# EAGLE board RCB-Board_SelfmadeLightv4 (EAGLE 5.11)
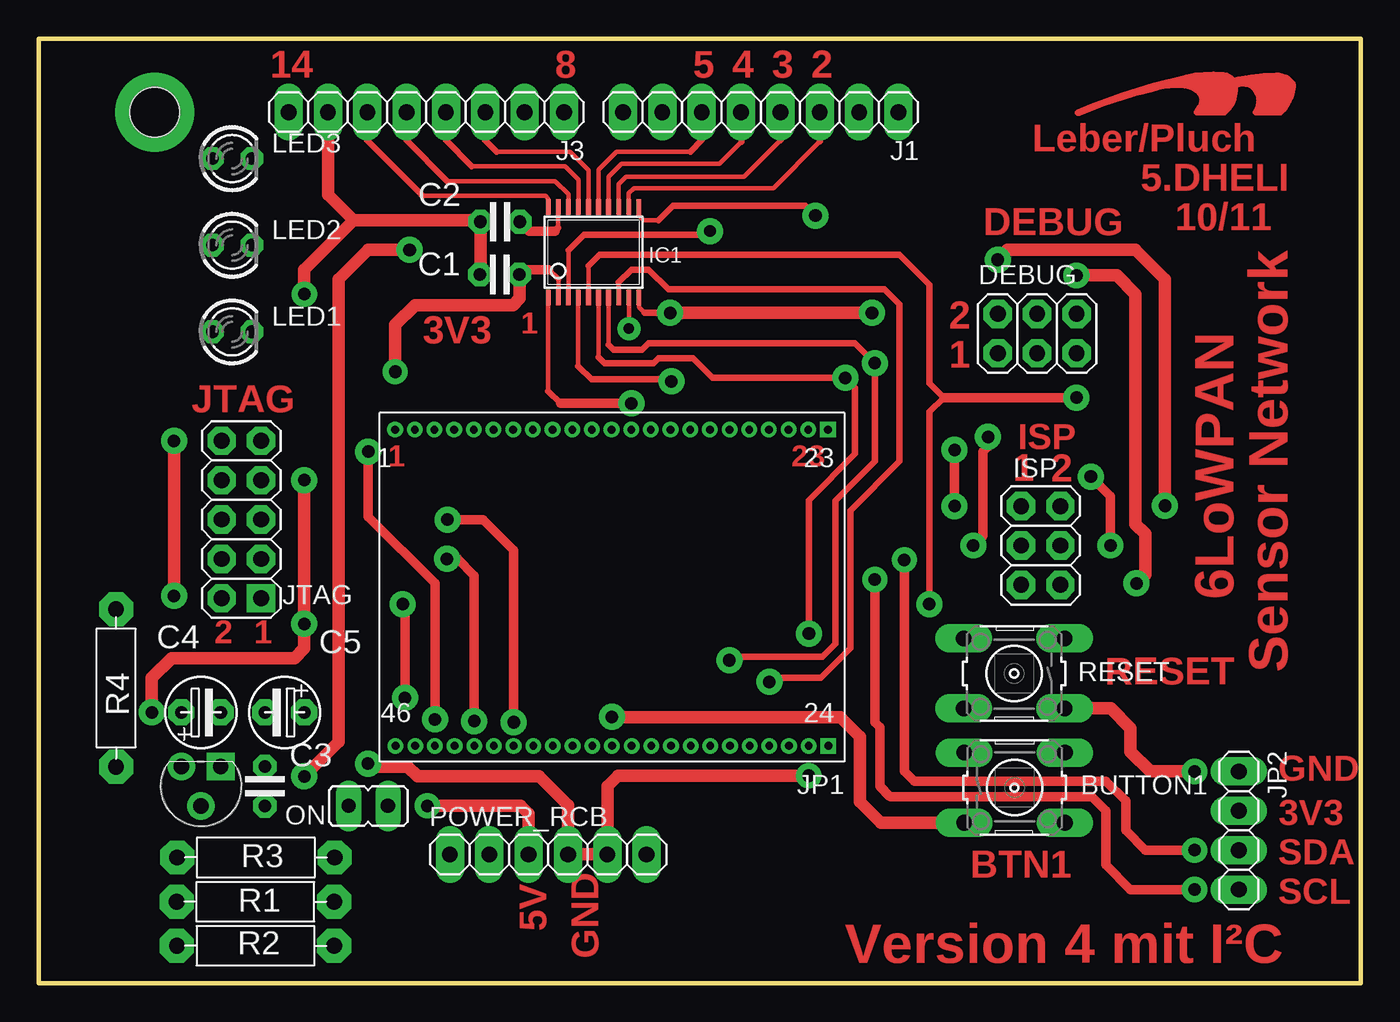
[diagram p0: board, top side]
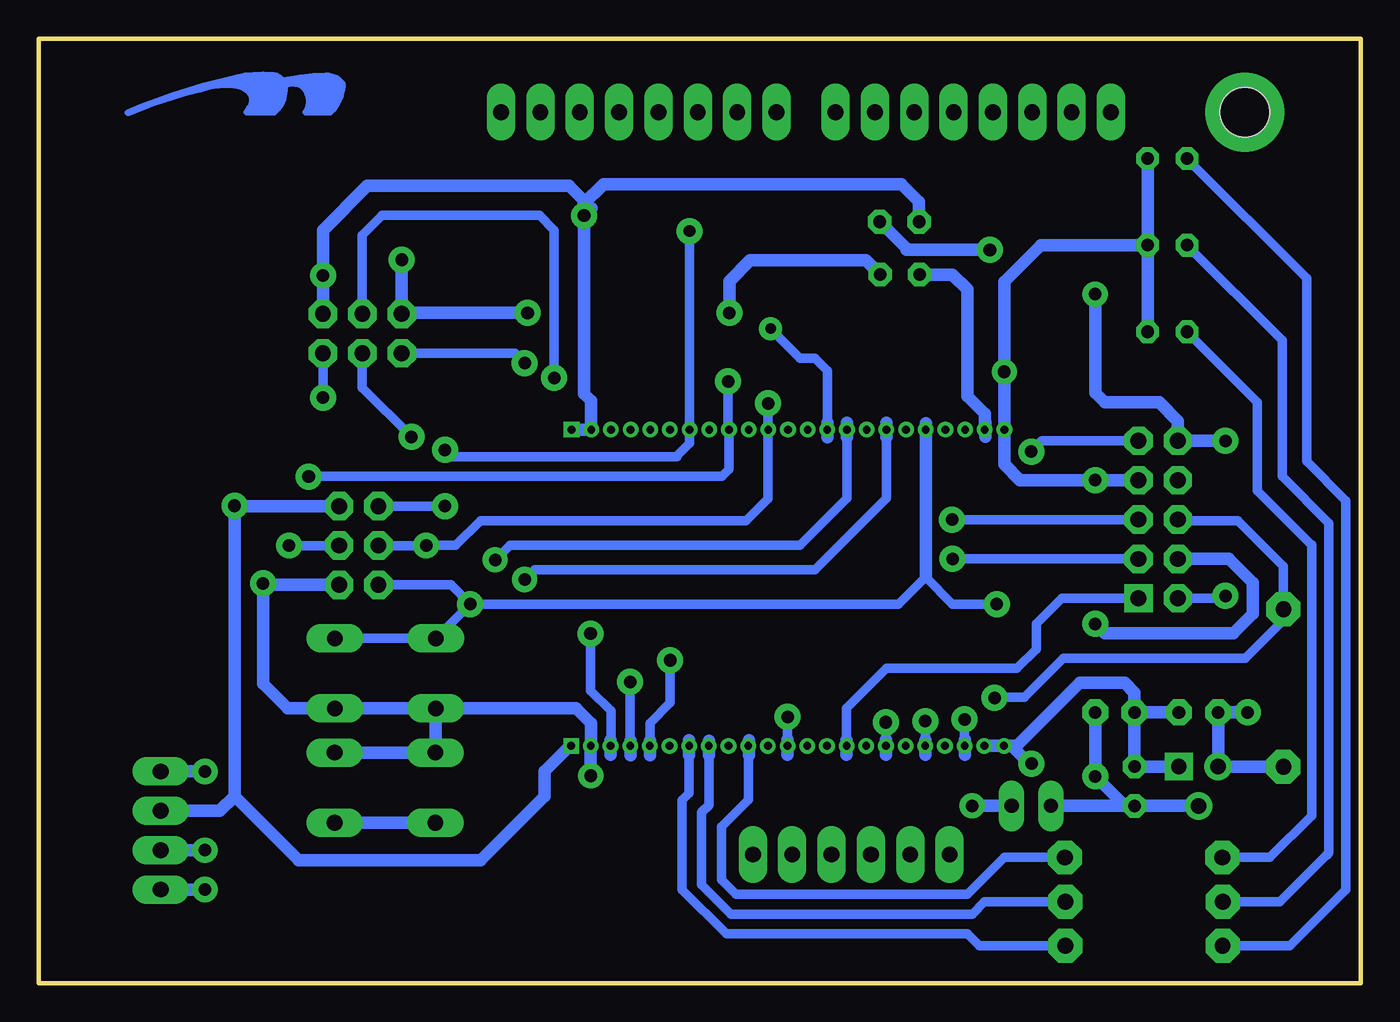
[diagram p1: board, bottom side, seen from below]

Size 85.34 x 60.93 mm. Coordinates in mm from the lower left corner, seen from the top.
Outline: 0,0 85.34,0 85.34,60.94 0,60.94 0,0
Copper layers (1*16): Top 0.035mm / dielectric 1.5mm / Bottom 0.035mm
Design rules "HTL-default *": minimum track width 16mil, minimum drill 32mil, track to track 16mil, track to pad 16mil, pad to pad 16mil, via to via 16mil, smd to smd 12mil, copper to edge 40mil, drill to drill 16mil, minimum pad ring 10mil, minimum via ring 16mil, stop-mask expansion 4mil, vias tented up to drill 0mil, thermal gap 16mil
Net classes: 0 default: width 0.254 mm, drill 0.305 mm, clearance 0.152 mm; 1 power: width 0.61 mm, drill 0.508 mm, clearance 0.152 mm; 2 gnd: width 0.305 mm, drill 0.508 mm, clearance 0.152 mm; 3 usbvcc: width 0.508 mm, drill 0.508 mm, clearance 0.152 mm; 4 aref: width 0.406 mm
Holes 3.2 mm at 7.49,56.2

## Footprints (pad centres in the part's own frame; a part is rotated, then mirrored left to right if it is on the bottom)
B3F-10XX = drill 1.016 long: 1 -3.251,2.261; 2 3.251,2.261; 3 -3.251,-2.261; 4 3.251,-2.261
C-2,5 = drill 0.813 pad 1.524 octagon: 1 -1.27,0; 2 1.27,0
ES-2,5D5 = drill 0.813 pad 1.676 octagon: 1 -1.27,0; 2 1.27,0
2X03 = drill 1.016 octagon: 1 -2.54,-1.27; 2 -2.54,1.27; 3 0,-1.27; 4 0,1.27; 5 2.54,-1.27; 6 2.54,1.27
TSSOP20 = smd 0.305 x 0.991: 1 -2.925,-2.918; 2 -2.275,-2.918; 3 -1.625,-2.918; 4 -0.975,-2.918; 5 -0.325,-2.918; 6 0.325,-2.918; 7 0.975,-2.918; 8 1.625,-2.918; 9 2.275,-2.918; 10 2.925,-2.918; 11 2.925,2.918; 12 2.275,2.918; 13 1.625,2.918; 14 0.975,2.918; 15 0.325,2.918; 16 -0.325,2.918; 17 -0.975,2.918; 18 -1.625,2.918; 19 -2.275,2.918; 20 -2.925,2.918
1X08 = drill 1.016 long: 1 -8.89,0; 2 -6.35,0; 3 -3.81,0; 4 -1.27,0; 5 1.27,0; 6 3.81,0; 7 6.35,0; 8 8.89,0
1X23 = drill 0.5 round: 1 29,-21.422; 2 27.73,-21.422; 3 26.46,-21.422; 4 25.19,-21.422; 5 23.92,-21.422; 6 22.65,-21.422; 7 21.38,-21.422; 8 20.11,-21.422; 9 18.84,-21.422; 10 17.57,-21.422; 11 16.3,-21.422; 12 15.03,-21.422; 13 13.76,-21.422; 14 12.49,-21.422; 15 11.22,-21.422; 16 9.95,-21.422; 17 8.68,-21.422; 18 6.14,-21.422; 19 7.41,-21.422; 20 4.87,-21.422; 21 3.6,-21.422; 22 2.33,-21.422; 25 2.303,-1.018; 26 3.572,-1.018; 27 4.843,-1.018; 28 6.112,-1.018; 29 7.383,-1.018; 30 8.652,-1.018; 31 9.922,-1.018; 32 11.193,-1.018; 33 12.463,-1.018; 34 13.732,-1.018; 35 15.002,-1.018; 36 16.273,-1.018; 37 17.543,-1.018; 38 18.812,-1.018; 39 20.082,-1.018; 40 21.352,-1.018; 41 22.622,-1.018; 42 23.892,-1.018; 43 25.163,-1.018; 44 26.433,-1.018; 45 27.703,-1.018; 46 28.973,-1.018 | drill 0.5 square: 23 1.06,-21.422; 24 1.032,-1.018
1X04 = drill 1.016 long: 1 -3.81,0; 2 -1.27,0; 3 1.27,0; 4 3.81,0
2X05 = drill 1.016 square: 1 -5.08,-1.27 | drill 1.016 octagon: 2 -5.08,1.27; 3 -2.54,-1.27; 4 -2.54,1.27; 5 0,-1.27; 6 0,1.27; 7 2.54,-1.27; 8 2.54,1.27; 9 5.08,-1.27; 10 5.08,1.27
LED3MM = drill 0.813 octagon: A -1.27,0; K 1.27,0
TO-92_MC = drill 0.991 square: 1 -2.54,-2.54 | drill 0.991 pad 1.676 round: 2 -1.27,0; 3 0,-2.54
JP1 = drill 0.914 long: 1 0,-1.27; 2 0,1.27
1X06 = drill 1.016 long: 1 -6.35,0; 2 -3.81,0; 3 -1.27,0; 4 1.27,0; 5 3.81,0; 6 6.35,0
R-10 = drill 1.016 pad 2.184 octagon: 1 -5.08,0; 2 5.08,0

## Placement (x,y rotation side)
BUTTON1  [B3F-10XX]  62.99,12.61 0 top
C1  100n  [C-2,5]  29.76,45.72 180 top
C2  100n  [C-2,5]  29.78,49.12 180 top
C3  100n  [C-2,5]  14.61,12.7 90 top
C4  100u  [ES-2,5D5]  10.48,17.46 0 top
C5  100u  [ES-2,5D5]  15.88,17.46 180 top
DEBUG  Tracing  [2X03]  64.45,41.91 0 top
IC1  MAX3002EUP  [TSSOP20]  35.81,47.16 0 top
ISP  ICSP  [2X03]  64.68,28.23 270 top
J1  [1X08]  46.61,56.2 180 top
J3  [1X08]  25.02,56.2 180 top
JP1  deRFmega128-22A00  [1X23]  52.01,14.29 180 top
JP2  [1X04]  77.47,9.84 270 top
JTAG  [2X05]  13.08,29.91 90 top
LED1  Rot  [LED3MM]  12.48,42.02 0 top
LED2  Rot  [LED3MM]  12.48,47.61 0 top
LED3  Rot  [LED3MM]  12.48,53.2 0 top
MCP1702-33  MCP1702-33  [TO-92_MC]  9.21,11.43 180 top
ON  [JP1]  21.27,11.43 270 top
POWER_RCB  [1X06]  32.89,8.29 0 top
R1  470  [R-10]  13.98,5.25 180 top
R2  470  [R-10]  14,2.4 180 top
R3  470  [R-10]  14.02,8.1 0 top
R4  4k7  [R-10]  4.99,19.04 90 top
RESET  [B3F-10XX]  62.97,19.98 180 top
U$2  [LOGO_15]  73.34,56.2 0 top

## Library data of the parts
BUTTON1 RESET = switch-omron; MPN: B3F-1000; OC_FARNELL: 176432; OC_NEWARK: 36M3542
C1-C5 = Kondensator
DEBUG ISP J1 J3 JP2 POWER_RCB = pinhead
IC1 = maxim (2)
JP1 JTAG = pinhead-2
LED1-LED3 = led
MCP1702-33 = mcp1702
ON = jumper
R1-R4 = Widerstand Standard
U$2 = HTL-Logo

## Nets
+3V3: C1.1 C4.1 DEBUG.2 IC1.2 IC1.10 ISP.2 JP1.1 JP1.24 JP2.2 JTAG.4 JTAG.7 LED1.K LED2.K LED3.K MCP1702-33.3 R4.1
+5V [usbvcc]: C2.1 C3.1 C5.1 IC1.19 MCP1702-33.2 ON.1
A_CTS: IC1.12 J1.3
A_MISO: IC1.18 J3.5
A_MOSI: IC1.17 J3.4
A_RESET: IC1.16 J3.3
A_RTS: IC1.13 J1.4
A_RX: IC1.14 J1.5
A_SCK: IC1.20 J3.6
A_TX: IC1.15 J1.6
AREF: JP1.3
CLKI: JP1.14
CTS: JP1.19
CTS/INT3: IC1.9 JP1.10
GND [gnd]: BUTTON1.1 BUTTON1.2 C1.2 C2.2 C3.2 C4.2 C5.2 DEBUG.6 IC1.11 ISP.6 J3.7 JP1.2 JP1.22 JP1.23 JP1.25 JP1.45 JP1.46 JP2.1 JTAG.2 JTAG.10 MCP1702-33.1 POWER_RCB.4 POWER_RCB.5 RESET.1 RESET.2
MISO: IC1.3 ISP.1 JP1.17
MOSI: IC1.4 ISP.4 JP1.15
N$2: LED1.A R3.1
N$3: LED2.A R1.2
N$4: LED3.A R2.2
N$5: ON.2 POWER_RCB.3
PB0: JP1.16
PB6: JP1.18
PB7: JP1.20
PD0/SCL: JP1.7 JP2.4
PD1/SDA: JP1.9 JP2.3
PD4: JP1.32
PD5/XCK1: JP1.12
PD6/T1: JP1.29
PD7/T0: JP1.11
PE2/XCK0: JP1.30 R2.1
PE3: JP1.31 R1.1
PE4: JP1.33 R3.2
PE5: BUTTON1.3 BUTTON1.4 JP1.35
PE6/T3: JP1.37
PE7: JP1.39
PF0/ADC0: JP1.34
PF1/ADC1: JP1.36
PF2/ADC2: JP1.41
PG1: JP1.4
PG2: JP1.6
PG5: JP1.8
RESET: DEBUG.5 IC1.5 ISP.5 JP1.5 JTAG.6 R4.2 RESET.3 RESET.4
RSTON: JP1.43
RTS: JP1.21
RTS/INT2: IC1.8 JP1.27
RXD0: DEBUG.4 IC1.6 JP1.26
SCK: DEBUG.3 IC1.1 ISP.3 JP1.13
TCK: JP1.38 JTAG.1
TDI: JP1.44 JTAG.9
TDO: JP1.42 JTAG.3
TMS: JP1.40 JTAG.5
TXD0: DEBUG.1 IC1.7 JP1.28

## Tracks (layer width: path | path; a pad name or v marks a point on that pad's centre or on a via)
+3V3  (via drill 0.81, 0.81 pad 1.68)
  Top 0.305: IC1.10 38.74,43.62 39.12,43.24 | 33.55,45.4 33.55,44.25 IC1.2
  Top 0.356: 32.92,46.04 33.55,45.4
  Top 0.406: 40.79,43.24 40.84,43.19 | v40.77,43.24 39.12,43.24
  Top 0.61: 32.92,46.04 31.34,46.04 C1.1
  Top 0.813: v40.77,43.24 40.79,43.24 v53.78,43.24 | v17.14,32.45 v17.14,23.18 17.14,21.59 16.51,20.95 8.57,20.95 7.3,19.68 v7.3,17.46 | v61.91,46.67 62.55,47.31 70.8,47.31 72.71,45.4 v72.71,30.8 | C1.1 31.03,44.22 31.05,44.2 30.61,43.75 24.3,43.75 23.01,42.47 v23.01,39.45
  Bottom 0.406: JP1.1 | 61.85,43.24 DEBUG.2
  Bottom 0.813: JP1.1 23.01,36.87 23.01,36.88 v23.01,39.45 23.01,45.25 20.65,47.61 LED2.K | JP1.1 23.01,33.47 22,32.45 v17.14,32.45 JTAG.7 | JTAG.4 8.53,27.37 6.99,25.82 6.99,23.81 8.23,22.57 16.54,22.57 v17.14,23.18 | v40.77,43.24 40.77,45.3 39.42,46.65 31.95,46.65 C1.1 | R4.1 9.2,13.96 MCP1702-33.3 C4.1 v7.3,17.46 | LED2.K LED3.K | JP1.24 51.05,15.3 52.7,13.65 52.7,12.06 56.83,7.94 68.58,7.94 72.71,12.06 | v53.78,43.24 61.85,43.24 | DEBUG.2 v61.91,46.67 | 72.71,12.06 72.71,29.53 72.68,29.55 72.68,30.77 | 72.68,30.77 ISP.2 | v72.71,30.8 72.68,30.77 | LED2.K LED1.K | JP2.2 73.66,11.11 72.71,12.06
+5V  (via drill 0.81 pad 1.68)
  Top 0.305: 33.53,48.73 33.53,50.06 IC1.19
  Top 0.406: 33.33,48.53 33.53,48.73
  Top 0.61: C2.1 31.65,48.53 33.33,48.53
  Top 0.813: v17.14,13.34 19.37,15.56 19.37,45.4 21.27,47.31 v23.94,47.31
  Bottom 0.813: v23.94,47.31 29.34,47.31 29.34,47.41 C2.1 | C3.1 15.24,11.43 v17.14,13.34 C5.1 | MCP1702-33.2 C3.1 | C3.1 ON.1
A_CTS
  Top 0.305: IC1.12 38.09,50.95 38.43,51.3 47.42,51.3 50.44,54.32
  Top 0.406: 50.44,54.32 50.44,56.17 J1.3
A_MISO
  Top 0.305: IC1.18 34.19,50.9 33.34,51.75 26.36,51.75
  Top 0.406: 26.36,51.75 23.75,54.37 J3.5
A_MOSI
  Top 0.305: IC1.17 34.84,51.84 33.97,52.7 27.95,52.7
  Top 0.406: 27.95,52.7 26.29,54.37 J3.4
A_RESET
  Top 0.305: IC1.16 35.49,52.46 34.29,53.66 29.57,53.66
  Top 0.406: 29.57,53.66 28.83,54.39 J3.3
A_RTS
  Top 0.305: IC1.13 37.44,51.55 37.92,52.03 45.52,52.03 47.88,54.39
  Top 0.406: 47.88,54.39 J1.4
A_RX
  Top 0.305: 45.36,54.29 43.94,52.87 37.63,52.87 36.83,52.07 36.82,52.07 36.78,52.03 36.78,50.08 IC1.14
  Top 0.406: 45.36,54.29 45.36,56.17 J1.5
A_SCK
  Top 0.305: IC1.20 32.89,50.61 32.7,50.8 24.78,50.8
  Top 0.406: 24.78,50.8 21.21,54.37 J3.6
A_TX
  Top 0.305: IC1.15 36.14,52.48 37.31,53.66 42.09,53.66
  Top 0.406: 42.09,53.66 42.8,54.37 J1.6
CTS/INT3  (via drill 0.69)
  Top 0.305: v38.1,42.23 38.1,44.23 IC1.9
  Bottom 0.61: JP1.10 34.44,39.52 35.24,40.32 36.2,40.32 v38.1,42.23
  Bottom 0.813: 34.44,35.2 34.44,35.56 | 34.44,35.56 34.44,36.16 | JP1.10 34.44,35.57 34.44,35.56
GND  (via drill 0.81, 0.81 pad 1.63, 0.81 pad 1.68)
  Top 0.305: IC1.11 38.74,49.53 38.73,49.53 39.05,49.21 40.01,49.21
  Top 0.406: 49.81,49.85 v50.14,49.52 49.49,50.16 40.96,50.16 40.01,49.21
  Top 0.813: v49.71,13.37 37.39,13.37 36.7,12.69 POWER_RCB.5 POWER_RCB.4 34.16,11.46 32.28,13.34 24.45,13.34 23.82,13.96 21.46,13.96 v21.26,14.16 | v8.74,34.99 v8.74,24.98 | C1.2 28.51,45.74 C2.2 28.42,49.21 20.32,49.21 | v70.87,25.79 71.42,26.35 71.42,28.99 70.8,29.62 70.8,44.45 69.6,45.66 v66.99,45.66 | v17.14,44.45 17.14,46.04 20.32,49.21 | J3.7 18.67,50.86 20.32,49.21 | v74.61,13.65 71.75,13.65 70.48,14.92 70.48,16.45 69.22,17.72 RESET.1
  Bottom 0.406: JP1.23 50.93,35.69 | JP1.25 | JP1.45 | v8.74,24.98 8.89,24.83 | C2.2 28.42,49.21 | JP1.2 24.28,35.59 24.24,35.56
  Bottom 0.61: 8.89,24.83 JTAG.2 | 60.26,17.72 60.27,17.72 | v70.87,25.79 70.77,25.69
  Bottom 0.813: JP1.23 JP1.22 49.68,37.58 50.14,38.04 v50.14,49.52 | JP1.46 JP1.45 | v49.71,13.37 JP1.25 | C2.2 28.51,50.42 29.64,51.55 48.9,51.55 50.16,50.28 50.16,49.54 v50.14,49.52 | BUTTON1.2 BUTTON1.1 59.72,14.89 RESET.2 60.27,17.72 RESET.1 69.26,17.72 70.87,19.32 v70.87,25.79 | JP1.25 49.7,16.78 50.65,17.72 60.26,17.72 | JP1.46 22.97,15.24 | DEBUG.6 v66.99,45.66 66.99,48.58 64.14,51.44 51.12,51.44 49.67,49.99 v50.14,49.52 | 70.77,25.69 ISP.6 | C5.2 C4.2 | C5.2 C3.2 MCP1702-33.1 | C5.2 14.61,18.73 15.24,19.37 18.14,19.37 22.2,15.3 22.54,15.3 | 22.54,15.3 JP1.46 | v21.26,14.16 21.4,14.16 22.54,15.3 | JTAG.10 11.75,35.05 | C1.2 26.35,45.72 25.4,44.77 25.4,37.87 24.26,36.73 24.26,35.73 JP1.2 | JTAG.10 11.81,36.26 13.02,37.47 16.51,37.47 17.14,38.1 v17.14,44.45 | JTAG.10 v8.74,34.99 | v74.61,13.65 JP2.1 | 24.24,35.24 24.24,35.56 24.24,36.2
MISO  (via drill 0.76 pad 1.68, 0.81 pad 1.68)
  Top 0.305: IC1.3 34.19,47.28
  Top 0.406: 34.19,47.28 35.2,48.3 43.1,48.3 v43.33,48.53
  Top 0.61: v59.12,34.4 v59.12,30.77
  Bottom 0.61: v59.12,30.77 ISP.1 | v43.33,48.53 v43.33,48.52 JP1.17 43.33,34.82 44.13,34.01 44.13,33.97 58.69,33.97 v59.12,34.4 58.94,34.23
MOSI  (via drill 0.81 pad 1.68)
  Top 0.305: 34.82,39.81 34.82,44.22 IC1.4
  Top 0.406: 34.82,39.81 35.69,38.95 40.72,38.95 v40.84,38.82
  Top 0.61: v69.19,28.23 69.19,31.41 v67.92,32.68
  Bottom 0.406: 67.89,32.7 v67.92,32.68 | 40.84,35.71 JP1.15
  Bottom 0.61: v69.19,28.23 ISP.4 | 67.89,32.7 41.25,32.7 40.79,33.16 JP1.15 | v40.84,38.82 40.84,35.71
N$1  (via drill 3.2 pad 5.08)
  other vias: 7.49,56.2
N$2
  Bottom 0.61: R3.1 5.87,8.1 3.17,10.79 3.17,28.27 3.19,28.27 6.67,31.75 6.67,37.48 LED1.A 11.1,41.91
N$3
  Bottom 0.61: R1.2 5.23,5.25 2.22,8.26 2.21,8.26 2.06,8.41 2.06,29.68 5.08,32.7 5.08,41.48 LED2.A 11.2,47.62
N$4
  Bottom 0.61: R2.2 4.58,2.4 0.95,6.03 0.95,31.11 3.49,33.66 3.49,45.48 LED3.A 11.04,53.02
N$5  (via drill 0.81)
  Top 0.813: POWER_RCB.3 31.62,10.92 31.11,11.43 v25.08,11.43
  Bottom 0.813: ON.2 v25.08,11.43
PD0/SCL  (via drill 0.81)
  Top 0.61: v74.61,6.03 70.48,6.03 68.9,7.62 68.9,11.11 68,12.01 54.97,12.01 54.93,12.05 54.93,12.06 54.29,12.7 54.29,16.51 53.98,16.83 v53.98,26.04
  Bottom 0.61: JP1.7 30.63,31.29 35.24,26.67 53.34,26.67 v53.98,26.04
  Bottom 0.813: v74.61,6.03 JP2.4 | 30.63,35.88 30.63,35.22 | 30.63,35.88 30.63,36.17 | JP1.7 30.63,35.87 30.63,35.88
PD1/SDA  (via drill 0.81)
  Top 0.61: v55.88,27.3 55.88,13.65 56.52,13.02 68.9,13.02 70.17,11.75 70.17,9.84 71.44,8.57 v74.61,8.57
  Bottom 0.61: JP1.9 33.17,31.29 36.2,28.26 54.93,28.26 v55.88,27.3
  Bottom 0.813: v74.61,8.57 JP2.3 | 33.16,35.56 33.16,35.2 | 33.16,35.56 33.16,36.16 | JP1.9 33.17,35.57 33.16,35.56
PE2/XCK0
  Bottom 0.61: JP1.30 43.36,12.26 43.81,11.8 43.81,6.03 40.96,3.17 25.4,3.17 24.62,2.4 R2.1
  Bottom 0.813: JP1.30 | JP1.30 43.36,14.71 | JP1.30 43.36,15.66
PE3
  Bottom 0.61: JP1.31 42.09,11.47 42.55,11.01 42.55,6.35 40.64,4.45 25.08,4.45 24.28,5.25 R1.1
  Bottom 0.813: JP1.31 42.08,15.55 42.08,15.56 | 42.08,15.56 42.08,14.69 | 42.08,15.56 42.08,15.65
PE4
  Bottom 0.61: 39.52,15.28 39.52,11.82 41.27,10.07 41.27,6.67 40.32,5.71 25.4,5.71 23.01,8.1 R3.2
  Bottom 0.813: 39.52,15.28 JP1.33 39.54,15.27 39.51,15.24 | 39.51,15.24 39.51,14.71 | 39.51,15.24 39.51,15.66
PE5  (via drill 0.81 pad 1.68)
  Top 0.61: 57.59,10.34 57.6,10.35
  Top 0.813: 57.6,10.35 BUTTON1.3 | v37.01,17.17 37.03,17.14 51.75,17.14 53.02,15.88 53.02,11.7 54.38,10.34 57.59,10.34
  Bottom 0.61: JP1.35 v37.01,17.17
  Bottom 0.813: BUTTON1.3 BUTTON1.4 | JP1.35 37.01,15.25 36.99,15.24 | 36.99,14.74 36.99,15.24 | 36.99,15.24 36.99,15.7
RESET  (via drill 0.81 pad 1.68)
  Top 0.305: 35.49,46.28 IC1.5
  Top 0.406: 23.65,24.3 v23.5,24.45 | 35.49,46.28 36.2,46.99 55.55,46.99 57.49,45.05 57.49,38.71 58.42,37.78 57.49,36.85 v57.49,24.45
  Top 0.61: v23.65,18.4 23.65,24.3 | 58.42,37.78 v66.99,37.78
  Bottom 0.406: 28.09,26.17 28.09,26.21 | 23.62,18.43 v23.65,18.4
  Bottom 0.61: 28.09,26.21 29.84,24.45 v57.49,24.45 | v23.5,24.45 26.36,24.45 28.09,26.17 | 23.62,18.43 21.72,18.43 19.19,20.95 7.46,20.95 4.99,23.42 R4.2 4.99,26.9 7.94,29.84 11.75,29.84 JTAG.6 | RESET.3 RESET.4 59.7,22.24 v57.49,24.45 | v57.49,24.45 58.74,25.69 ISP.5 | v66.99,37.78 DEBUG.5
  Bottom 0.813: 28.09,26.21 JP1.5 | JP1.5 28.08,35.18 | JP1.5 28.08,36.13
RTS/INT2  (via drill 0.81 pad 1.68)
  Top 0.305: 37.44,45.23 IC1.8
  Top 0.406: 37.44,45.23 38.25,46.04 39.37,46.04 40.64,44.77 54.61,44.77 55.56,43.81 55.56,33.66 52.39,30.48 52.39,21.59 50.48,19.68 47.24,19.68 47.24,19.51 v47.16,19.43
  Bottom 0.61: JP1.27 v47.16,19.43
  Bottom 0.813: 47.16,14.68 47.16,15.24 | 47.16,15.24 47.16,15.63 | JP1.27 47.16,15.25 47.16,15.24
RXD0  (via drill 0.81 pad 1.68)
  Top 0.305: 36.14,40.38 IC1.6
  Top 0.406: 36.14,40.38 36.51,40.01 39.69,40.01 40.01,40.32 42.23,40.32 43.5,39.05 v52.07,39.05 52.7,38.42 52.7,34.14 49.73,31.17 49.73,22.55 v49.72,22.54
  Bottom 0.61: v49.72,22.54 49.72,18.87 48.41,17.56 48.41,15.33 JP1.26 | DEBUG.4 64.45,48.26 63.18,49.53 53.02,49.53 52.07,48.58 v52.07,39.05
  Bottom 0.813: 48.42,14.72 48.42,15.24 | 48.42,15.24 48.42,15.67 | 48.41,15.33 48.41,15.25 48.42,15.24
SCK  (via drill 0.81 pad 1.68)
  Top 0.305: IC1.1 32.89,38.19
  Top 0.406: 33.67,37.41 32.89,38.19
  Top 0.61: v38.26,37.41 33.67,37.41 | v61.28,35.24 61.28,34.61 60.96,34.29 60.96,28.87 v60.33,28.23
  Bottom 0.406: 38.28,35.68 JP1.13 38.26,35.73
  Bottom 0.61: 38.26,35.73 v38.26,37.41 | DEBUG.3 64.45,38.42 v61.28,35.24 | ISP.3 v60.33,28.23 60.3,28.26 58.42,28.26 56.83,29.84 39.69,29.84 38.28,31.25 38.28,35.68
TCK
  Bottom 0.406: JP1.38
  Bottom 0.61: JP1.38 33.2,17.74 30.63,20.31 22.2,20.31 20.95,21.55 20.95,23.18 19.3,24.83 JTAG.1
  Bottom 0.813: 33.2,15.24 33.2,14.72 | 33.2,15.24 33.2,15.67 | JP1.38 33.19,15.24 33.2,15.24
TDI  (via drill 0.81 pad 1.68)
  Top 0.61: v21.27,34.29 21.27,30.1 25.58,25.79 v25.58,17
  Bottom 0.406: JP1.44
  Bottom 0.61: JTAG.9 20.57,34.99 v21.27,34.29 | JP1.44 v25.58,17
  Bottom 0.813: 25.57,14.74 25.57,15.24 | 25.57,15.24 25.57,15.7 | JP1.44 25.58,15.25 25.57,15.24
TDO  (via drill 0.81 pad 1.68)
  Top 0.61: v26.35,27.37 27.03,27.37 28.12,26.28 v28.12,16.9
  Bottom 0.406: JP1.42
  Bottom 0.61: JTAG.3 v26.35,27.37 | v28.12,16.9 28.12,15.56 JP1.42
  Bottom 0.813: 28.12,15.56 28.12,14.72 | 28.12,15.56 28.12,15.67 | JP1.42 28.11,15.55 28.12,15.56
TMS  (via drill 0.81 pad 1.68)
  Top 0.61: v30.66,16.83 30.66,27.93 28.68,29.91 v26.39,29.91
  Bottom 0.406: v26.39,29.91 26.77,29.91 | JP1.40
  Bottom 0.61: JTAG.5 v26.39,29.91 | v30.66,16.83 JP1.40
  Bottom 0.813: 30.64,15.24 30.64,14.73 | 30.64,15.24 30.64,15.68 | JP1.40 30.65,15.25 30.64,15.24
TXD0  (via drill 0.81 pad 1.68)
  Top 0.305: 36.79,41.18 IC1.7
  Top 0.406: 36.79,41.18 37.11,40.86 38.95,40.86 39.37,41.27 52.7,41.27 v53.98,40.01 53.98,33.66 51.44,31.11 51.44,21.89 50.6,21.06 44.81,21.06 v44.58,20.83 44.7,20.95
  Bottom 0.406: 45.85,15.35 JP1.28
  Bottom 0.61: v44.58,20.83 44.58,18.1 45.9,16.78 JP1.28 | DEBUG.1 54.61,40.64 v53.98,40.01
  Bottom 0.813: 45.88,14.69 45.88,15.24 | 45.88,15.24 45.88,15.65 | 45.85,15.35 45.85,15.28 45.88,15.24

## Text on the board
Top: 14 | 8 | 5 | 4 | 3 | 2 | Leber/Pluch | 5.DHELI | 10/11 | DEBUG | Sensor Network | 1 | 2 | 3V3 | 1 | JTAG | ISP | 1 | 23 | 1 | 2 | 6LoWPAN | 2 | 1 | RESET | GND | 3V3 | BTN1 | SDA | 5V | SCL | Version 4 mit I²C | GND